# Altium PCB final.PcbDoc
Units mm, origin at the board's own origin, x right, y up, seen from the top; angles counter-clockwise.
Board outline 152.4 x 101.6 mm, 2 copper layers (Top Layer, Bottom Layer); 8 components, 24 nets, 47 pads, 0 vias.
Unrouted connection lines stored in the file: 17.
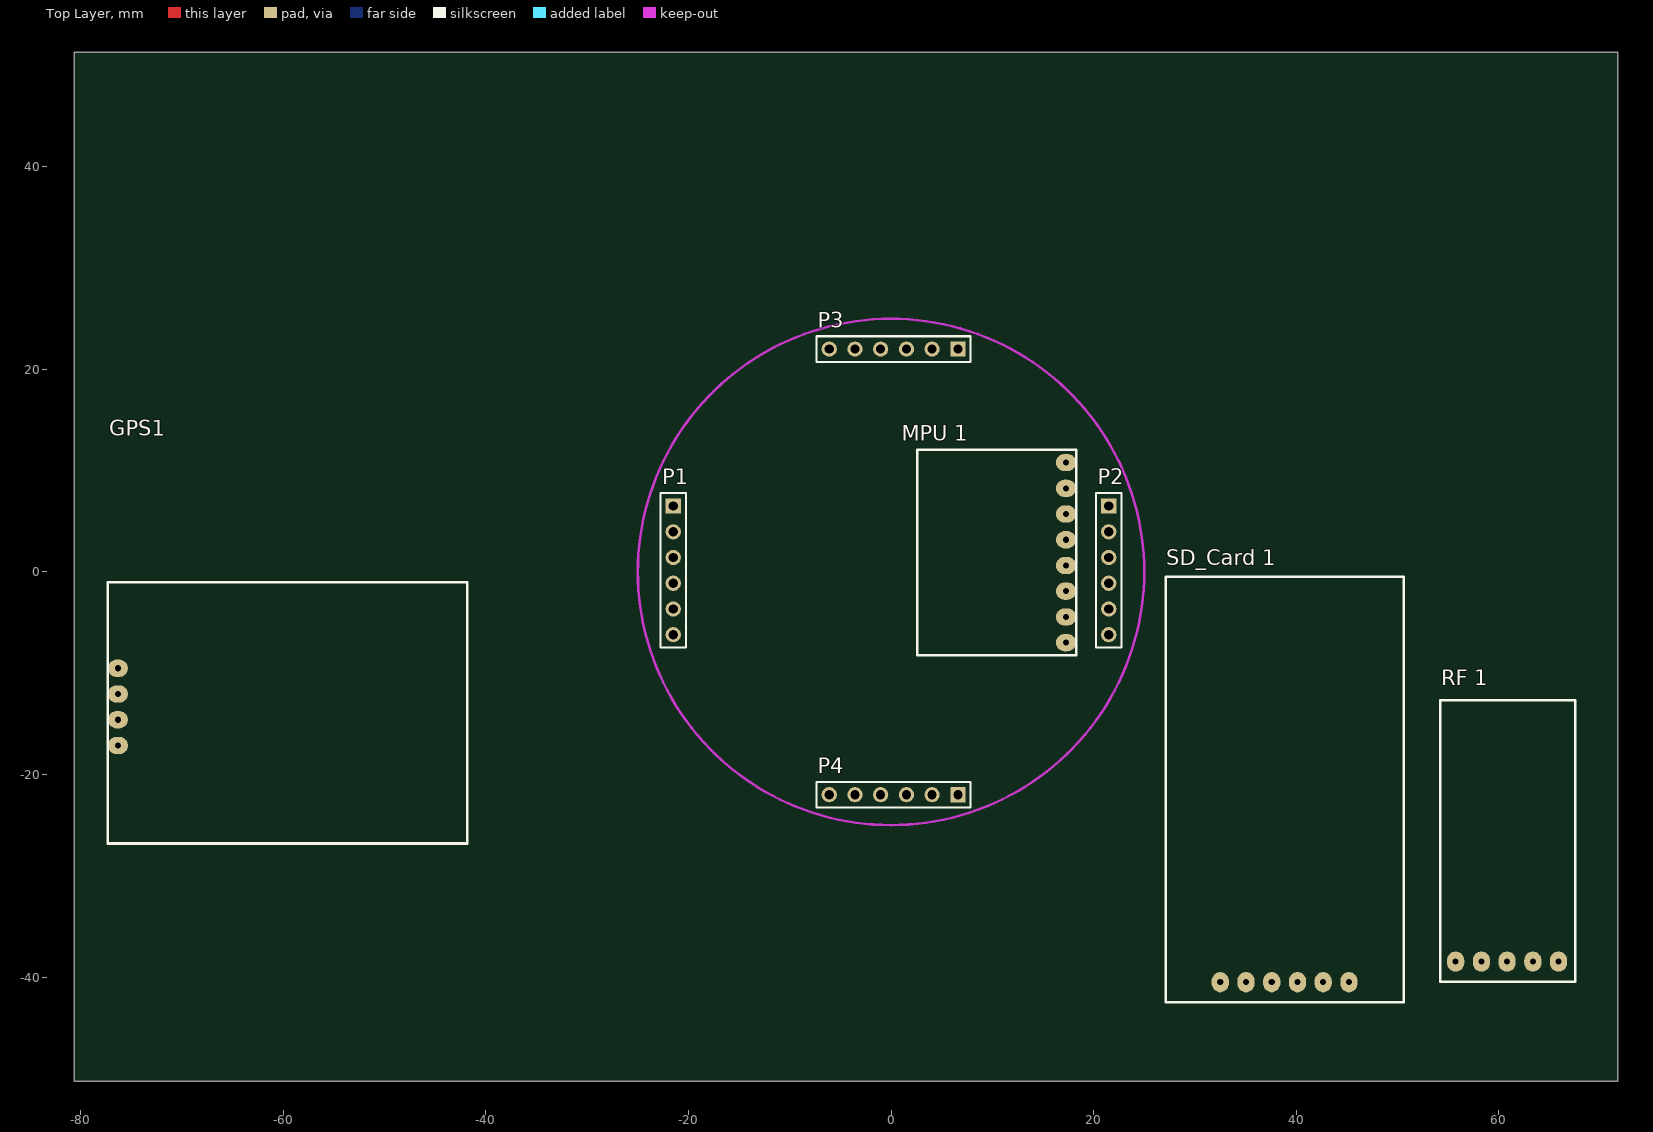
[diagram p0: Top Layer view]
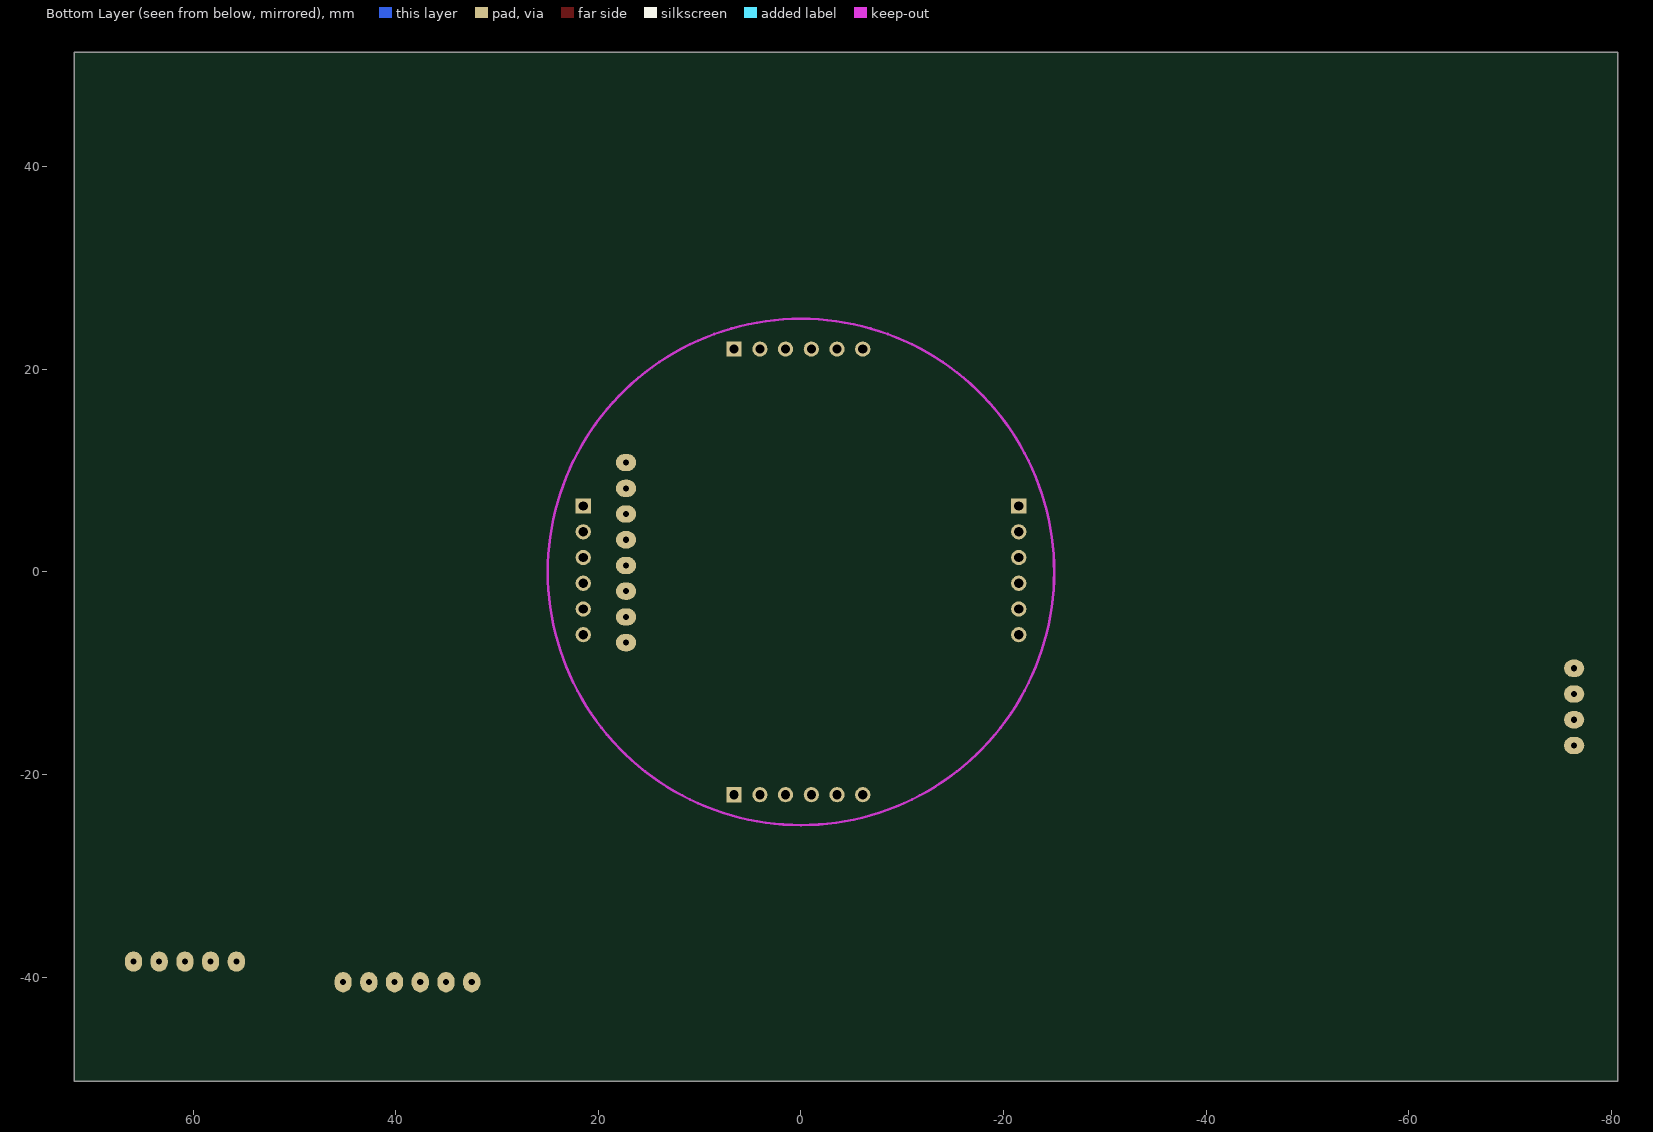
[diagram p1: Bottom Layer view, seen from below]

## Layer stack, top to bottom
Top Solder: solder mask 0.0102, Solder Resist, Dk 3.5
Top Layer: signal copper 0.0356
Dielectric 1: dielectric 0.32, FR-4, Dk 4.8
Bottom Layer: signal copper 0.0356
Bottom Solder: solder mask 0.0102, Solder Resist, Dk 3.5

## Board outline
-80.645,-50.292 71.755,-50.292 71.755,51.308 -80.645,51.308

## Design rules (kind name [scope] priority, off if disabled: settings)
Clearance [All] p1: gap=0.5 ignorepadtopadclearanceinfootprint=FALSE
PolygonConnect [All] p1: connectstyle=Relief reliefconductorwidth=0.254 reliefentries=4 polygonreliefangle="90 Angle" airgapwidth=0.254
RoutingVias [All] p1: holewidth=0.711 width=1.27 viastyle="Through Hole" minholewidth=0.711 minwidth=1.27 maxholewidth=0.711 maxwidth=1.27
SolderMaskExpansion [All] p1: expansion=0.102
Width [All] p1: maxlimit=1 minlimit=0.5 preferedwidth=0.7
30 further rules are at their usual default settings.

## Components (designator, comment, footprint, x,y, rotation, side; value= is the part's Value field where it differs from the comment)
GPS1 "GPS" GPS -77.343,-1.016 r90 top
"MPU 1" "MPU" MPU 2.572,12.065 r90 top
P1 "Header 6" HDR1X6 -21.5,6.5 r270 top
P2 "Header 6" HDR1X6 21.5,6.5 r270 top
P3 "Header 6" HDR1X6 6.6,22 r180 top
P4 "Header 6" HDR1X6 6.6,-22 r180 top
"RF 1" "RF" RF 55.753,-40.481 r90 top
"SD_Card 1" "SD_Card" SD_Card 38.862,-42.513 r0 top

## Footprints (in the part's own frame and the unit in brackets; to place one, negate y for a bottom-side part, rotate by r counter-clockwise, add the part's x,y. Pads: shape width x height; smd on the part's side, far side on the other; paste and mask are expansions set on the pad)
GPS [mm]
  oval 1.7x2 hole 0.6: 12(-16.12,-1) 13(-13.58,-1) 14(-11.04,-1) 15(-8.5,-1)
  silkscreen extent -25.8,-35.5 0,0, body extent -25.02,-47.98 13.71,-0.13, height 20.61
HDR1X6 [mm] "Connector; Header; 6 Position"
  rect 1.5x1.5 hole 0.9: 1(0,0)
  round 1.5 hole 0.9: 2(2.54,0) 3(5.08,0) 4(7.62,0) 5(10.16,0) 6(12.7,0)
  silkscreen extent -1.27,-1.27 13.97,1.27
MPU [mm]
  oval 1.7x2 hole 0.6: 1(-19.05,-14.7) 2(-16.51,-14.7) 3(-13.97,-14.7) 4(-11.43,-14.7) 5(-8.89,-14.7) 6(-6.35,-14.7) 7(-3.81,-14.7) 8(-1.27,-14.71)
  silkscreen extent -20.3,-15.7 0,0, body extent -25.27,-15.75 0.13,1.79, height 1.7
RF [mm]
  oval 2x1.7 hole 0.6: 32(2,-10.16) 33(2,-7.62) 34(2,-5.08) 35(2,-2.54) 36(2,0)
  silkscreen extent 0,-11.81 27.81,1.52, body extent 0.86,-11.73 28.55,1.57, height 25.9
SD_Card [mm]
  oval 1.7x2 hole 0.6: 37(6.35,2) 38(3.81,2) 39(1.27,2) 40(-1.27,2) 41(-3.81,2) 42(-6.35,2)
  silkscreen extent -11.75,0 11.75,42.04, body extent -11.94,-5.08 12.06,40.64, height 5.59

## Part data
P1 P2 P3 P4: "Header, 6-Pin", LatestRevisionDate=17-Jul-2002, LatestRevisionNote="Re-released for DXP Platform.", Publisher="Altium Limited"

## Nets (pads, with @x,y where several pads share a name; then routed paths per layer and width w, separated by ;. In a path a pad name is that pad's centre, name@x,y a point inside that pad or via, vN(x,y) a via of type N, cw(c..) or ccw(c..) an arc to the next point about the centre after c; other vN are vias at no path point)
"3.3 volt": "MPU 1.8" GPS1.12 P1.6
"5 volt": "RF 1.32" "SD_Card 1.38" P1.5
"Analog 0": P3.5
"Analog 1": P3.4
"Analog 2": P3.3
"Analog 3": P3.2
AREF: P3.6
CS: "SD_Card 1.42" P1.4
"Digital 3": P3.1
"Digital 5": P4.1
"Digital 6": P4.2
"Digital 7": P4.3
"Digital 8": P4.4
"Digital 9": P4.5
"Digital 10": P4.6
GND: "MPU 1.7" "RF 1.33" "SD_Card 1.37" GPS1.15 P2.1
INT: "MPU 1.1" P1.3
MISO: "SD_Card 1.39" P2.5
MOSI: "SD_Card 1.40" P2.6
RX: GPS1.14 P1.1
SCK: "SD_Card 1.41" P2.4
SCL: "MPU 1.6" P2.2
SDA: "MPU 1.5" P2.3
TX: "RF 1.34" P1.2
pads on no net: "MPU 1.2" "MPU 1.3" "MPU 1.4" "RF 1.35" "RF 1.36" GPS1.13

## Polygon pours and split planes (outlines as drawn)
no net on Top Layer "Top Layer-No Net 1" (solid, pour order 32): 37.846,-36.83
no net on Top Layer "Top Layer-No Net" (solid, pour order 14): 11.176,-82.677
no net on Bottom Layer "Bottom Layer-No Net" (solid, pour order 38): -44.323,32.766

## Keep-outs
Keep-Out Layer:
  circle w0.254: c0,0 r25